# EAGLE board untitled (EAGLE 9.6.2)

Size 84.44 x 51.1 mm. Coordinates in mm from the lower left corner, seen from the top.
Outline: 0,0 84.44,0 84.44,51.1 0,51.1 0,0
Copper layers (1*16): Top 0.035mm / dielectric 1.5mm / Bottom 0.035mm
Design rules "default": minimum track width 6mil, minimum drill 0.35mm, track to track 6mil, track to pad 6mil, pad to pad 6mil, via to via 6mil, smd to smd 6mil, copper to edge 40mil, drill to drill 6mil, minimum pad ring 10mil, minimum via ring 8mil, stop-mask expansion 4mil, vias tented up to drill 0mil, thermal gap 10mil

## Footprints (pad centres in the part's own frame; a part is rotated, then mirrored left to right if it is on the bottom)
C0805K = smd 1.1 x 1.4: 1 -1,0; 2 1,0
E2,5-6 = drill 0.813 pad 1.778: + -1.27,0 | drill 0.813 pad 1.778 octagon: - 1.27,0
SOD-323 = smd 0.63 x 0.83: A 1.15,0; C -1.15,0
SOT23 = smd 1 x 1.4: 1 -0.95,-1.1; 2 0.95,-1.1; 3 0,1.1
CON_39301060 = drill 1.803 pad 2.311 square: 1 0,0 | drill 1.803 pad 2.311: 2 -4.191,0; 3 -8.407,0; 4 0,5.512; 5 -4.191,5.512; 6 -8.407,5.512 | drill 2.997 pad 2.997: M1 0,-7.29; M2 -8.407,-7.29
TE_1744429-2 = drill 1.75 pad 2.1 square: 1 0,0 | drill 1.75 pad 2.1: 2 3.96,0 | hole 1.68: 1.98,3.18; 1.98,3.18
1X05 = drill 1.016 pad 1.88: 1 0,0; 2 2.54,0; 3 5.08,0; 4 7.62,0; 5 10.16,0
1X04_NO_SILK = drill 1.016 pad 1.88: 1 0,0; 2 2.54,0; 3 5.08,0; 4 7.62,0
SMT-JUMPER_3_1-NC_TRACE_SILK = smd 0.66 x 1.27: 1 -1.041,0; 2 0,0; 3 1.041,0
R0805 = smd 1.1 x 1.4: 1 -1,0; 2 1,0
PWP0016J_N = smd 1.4 x 0.45: 1 -2.95,2.275; 2 -2.95,1.625; 3 -2.95,0.975; 4 -2.95,0.325; 5 -2.95,-0.325; 6 -2.95,-0.975; 7 -2.95,-1.625; 8 -2.95,-2.275; 9 2.95,-2.275; 10 2.95,-1.625; 11 2.95,-0.975; 12 2.95,-0.325; 13 2.95,0.325; 14 2.95,0.975; 15 2.95,1.625; 16 2.95,2.275 | smd 3.4 x 5: 17 0.025,0 | smd 0.5 x 0.5: 18 0,0; 19 0,-0.95; 20 0,0.95; 21 0,1.9; 22 0,-1.9; 23 1.35,-1.9; 24 1.35,1.9; 25 1.35,0.95; 26 1.35,-0.95; 27 1.35,0; 28 -1.35,0; 29 -1.35,-0.95; 30 -1.35,0.95; 31 -1.35,1.9; 32 -1.35,-1.9
SO08 = smd 0.6 x 1.2: 1 -1.905,-2.8; 2 -0.635,-2.8; 3 0.635,-2.8; 4 1.905,-2.8; 5 1.905,2.8; 6 0.635,2.8; 7 -0.635,2.8; 8 -1.905,2.8
ARDUINO_MINI = drill 1.016 pad 1.88: 1 -7.62,12.7; 2 -7.62,10.16; 3 -7.62,7.62; 4 -7.62,5.08; 5 -7.62,2.54; 6 -7.62,0; 7 -7.62,-2.54; 8 -7.62,-5.08; 9 -7.62,-7.62; 10 -7.62,-10.16; 11 -7.62,-12.7; 12 -7.62,-15.24; 13 7.62,-15.24; 14 7.62,-12.7; 15 7.62,-10.16; 16 7.62,-7.62; 17 7.62,-5.08; 18 7.62,-2.54; 19 7.62,0; 20 7.62,2.54; 21 7.62,5.08; 22 7.62,7.62; 23 7.62,10.16; 24 7.62,12.7

## Placement (x,y rotation side)
C1  0.022uF  [C0805K]  -35.56,58.42 0 top  (outside the outline)
C2  0.1uF  [C0805K]  -40.64,58.42 0 top  (outside the outline)
C3  0.1uF  [C0805K]  -45.72,58.42 0 top  (outside the outline)
C4  0.1uF  [C0805K]  -85.09,-73.66 0 top  (outside the outline)
C5  0.1uF  [C0805K]  -85.09,-77.47 0 top  (outside the outline)
C6  10uF  [E2,5-6]  -85.09,-125.73 0 top  (outside the outline)
C7  10uF  [E2,5-6]  -85.09,-132.08 0 top  (outside the outline)
C8  10uF  [E2,5-6]  -85.09,-138.43 0 top  (outside the outline)
C9  10uF  [E2,5-6]  -85.09,-144.78 0 top  (outside the outline)
D1  2.6V  [SOD-323]  -85.09,-29.21 0 top  (outside the outline)
D2  2.6V  [SOD-323]  -80.01,-54.61 0 top  (outside the outline)
IC1  ISL21080  [SOT23]  -85.09,-67.31 0 top  (outside the outline)
J1  39301060  [CON_39301060]  12.06,14.61 90 bottom
J2  1744429-2  [TE_1744429-2]  20.32,36.83 270 top
J3  [1X05]  -85.09,-60.96 0 top  (outside the outline)
J4  [1X04_NO_SILK]  -85.09,-120.65 0 top  (outside the outline)
JP1  JUMPER-SMT_3_1-NC_TRACE_SILK  [SMT-JUMPER_3_1-NC_TRACE_SILK]  -48.26,43.18 0 top  (outside the outline)
JP2  JUMPER-SMT_3_1-NC_TRACE_SILK  [SMT-JUMPER_3_1-NC_TRACE_SILK]  -62.23,2.54 0 top  (outside the outline)
R1  2.78k  [R0805]  -58.42,43.18 0 top  (outside the outline)
R2  10k  [R0805]  -67.31,-8.89 0 top  (outside the outline)
R3  10k  [R0805]  -20.32,58.42 0 top  (outside the outline)
R4  10k  [R0805]  -25.4,58.42 0 top  (outside the outline)
R5  10k  [R0805]  -30.48,58.42 0 top  (outside the outline)
R6  62k or 20k  [R0805]  -67.31,-3.81 0 top  (outside the outline)
R7  10k  [R0805]  -85.09,-39.37 0 top  (outside the outline)
R8  100  [R0805]  -85.09,-34.29 0 top  (outside the outline)
R9  10k  [R0805]  -85.09,-44.45 0 top  (outside the outline)
R10  100  [R0805]  -85.09,-49.53 0 top  (outside the outline)
R11  10k  [R0805]  -80.01,-49.53 0 top  (outside the outline)
R12  10k  [R0805]  -85.09,-54.61 0 top  (outside the outline)
R13  10k  [R0805]  -85.09,-82.55 0 top  (outside the outline)
R14  5k  [R0805]  -85.09,-88.9 0 top  (outside the outline)
R15  10k  [R0805]  -85.09,-95.25 0 top  (outside the outline)
R16  5k  [R0805]  -85.09,-101.6 0 top  (outside the outline)
R17  10k  [R0805]  -85.09,-107.95 0 top  (outside the outline)
R18  5k  [R0805]  -85.09,-114.3 0 top  (outside the outline)
U1  DRV8874PWPR  [PWP0016J_N]  27.3,21.59 0 top
U2  LMV358  [SO08]  -82.55,-13.97 0 top  (outside the outline)
U$1  ARDUINO_MINI  [ARDUINO_MINI]  56.52,18.41 180 bottom

## Library data of the parts
C1-C9 R1-R18 = adafruit
D1 D2 = SparkFun-DiscreteSemi; PROD_ID: DIO-08199
IC1 = linear
J1 = 39301060; COPYRIGHT: Copyright (C) 2022 Ultra Librarian. All rights reserved.; MANUFACTURER_PART_NUMBER: 39301060; MFR_NAME: Molex Connector Corporation
J2 = 1744429-2; MANUFACTURER: TE; PARTREV: R; STANDARD: Manufacturer Recommendations
J3 = SparkFun-Connectors
J4 = SparkFun-Connectors; PROD_ID: CONN-09696
JP1 JP2 = SparkFun-Jumpers
U1 = DRV8874; COPYRIGHT: Copyright (C) 2022 Ultra Librarian. All rights reserved.; MANUFACTURER_PART_NUMBER: DRV8874PWPR; MFR_NAME: Texas Instruments; REFDES: RefDes; TYPE: TYPE
U2 = SparkFun-IC-Amplifiers; PROD_ID: IC-09657
U$1 = SparkFun-Retired

## Nets
19V: C2.1 C3.1 C6.+ C7.+ J2.1 J3.4 U1.11
BTN_1: J4.1 U$1.7
BTN_2: J4.3 U$1.8
EN/IN1: R5.2 U1.1 U$1.9
FAULT: R2.1 U1.4 U$1.12
GND: C3.2 C4.2 C5.2 C6.- C7.- C8.- C9.- D1.A D2.A IC1.3 J1.2 J2.2 J3.2 J3.3 J4.2 J4.4 JP1.3 R1.1 R3.1 R4.1 R5.1 R6.2 R9.1 R12.1 R14.1 R16.1 R18.1 U1.9 U1.15 U1.17 U2.4 U$1.4
GPIO_1: J1.6 U2.3
GPIO_1_PROTECTED: R7.1 R8.1 R9.2 R15.1
GPIO_2: J1.1 U2.5
GPIO_2_PROTECTED: R10.1 R11.1 R12.2 R13.1
ISENSE: R1.2 R17.1 U1.6
M_ONE: J1.4 U1.8
M_TWO: J1.5 U1.10
N$1: C1.2 U1.14
N$2: C1.1 U1.13
N$3: R17.2 R18.2 U$1.17
N$4: C2.2 U1.12
N$5: JP1.2 U1.16
N$6: R7.2 U2.1 U2.2
N$7: D1.C R8.2
N$8: R11.2 U2.6 U2.7
N$9: D2.C R10.2
N$10: JP2.2 U1.7
N$12: JP2.1 R6.1
N$13: R13.2 R14.2 U$1.19
N$15: R15.2 R16.2 U$1.18
PH/IN2: R4.2 U1.2 U$1.10
SLEEP_IN: R3.2 U1.3 U$1.11
VCC: C5.1 C8.+ C9.+ IC1.1 J1.3 J3.1 JP1.1 R2.2 U2.8 U$1.21
VREF: C4.1 IC1.2 U1.5

## Tracks (layer width: path | path; a pad name or v marks a point on that pad's centre or on a via)
19V  (6 unrouted)
BTN_1  (1 unrouted)
BTN_2  (1 unrouted)
EN/IN1  (2 unrouted)
FAULT  (2 unrouted)
GND  (31 unrouted)
GPIO_1  (1 unrouted)
GPIO_1_PROTECTED  (3 unrouted)
GPIO_2  (1 unrouted)
GPIO_2_PROTECTED  (3 unrouted)
ISENSE  (2 unrouted)
M_ONE  (1 unrouted)
M_TWO  (1 unrouted)
N$1  (1 unrouted)
N$2  (1 unrouted)
N$3  (2 unrouted)
N$4  (1 unrouted)
N$5  (1 unrouted)
N$6  (2 unrouted)
N$7  (1 unrouted)
N$8  (2 unrouted)
N$9  (1 unrouted)
N$10  (1 unrouted)
N$12  (1 unrouted)
N$13  (2 unrouted)
N$15  (2 unrouted)
PH/IN2  (2 unrouted)
SLEEP_IN  (2 unrouted)
VCC  (9 unrouted)
VREF  (2 unrouted)